# EAGLE board dualHbridge-v2 (EAGLE 8.7.1)
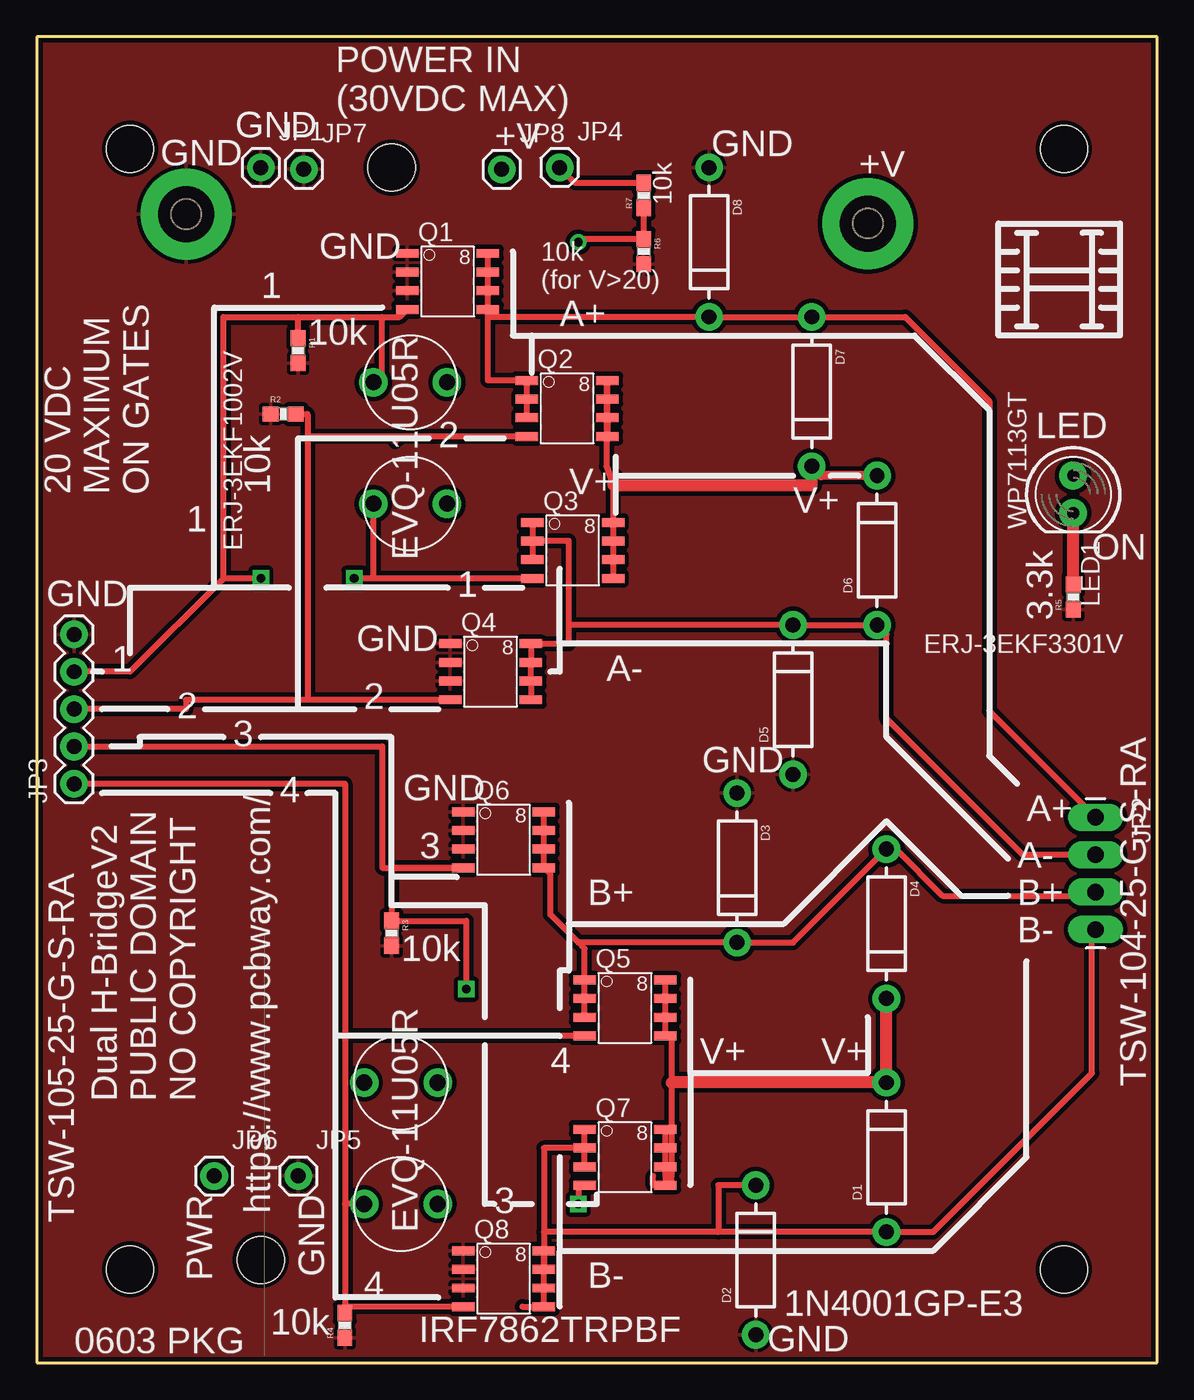
[diagram p0: board, top side]
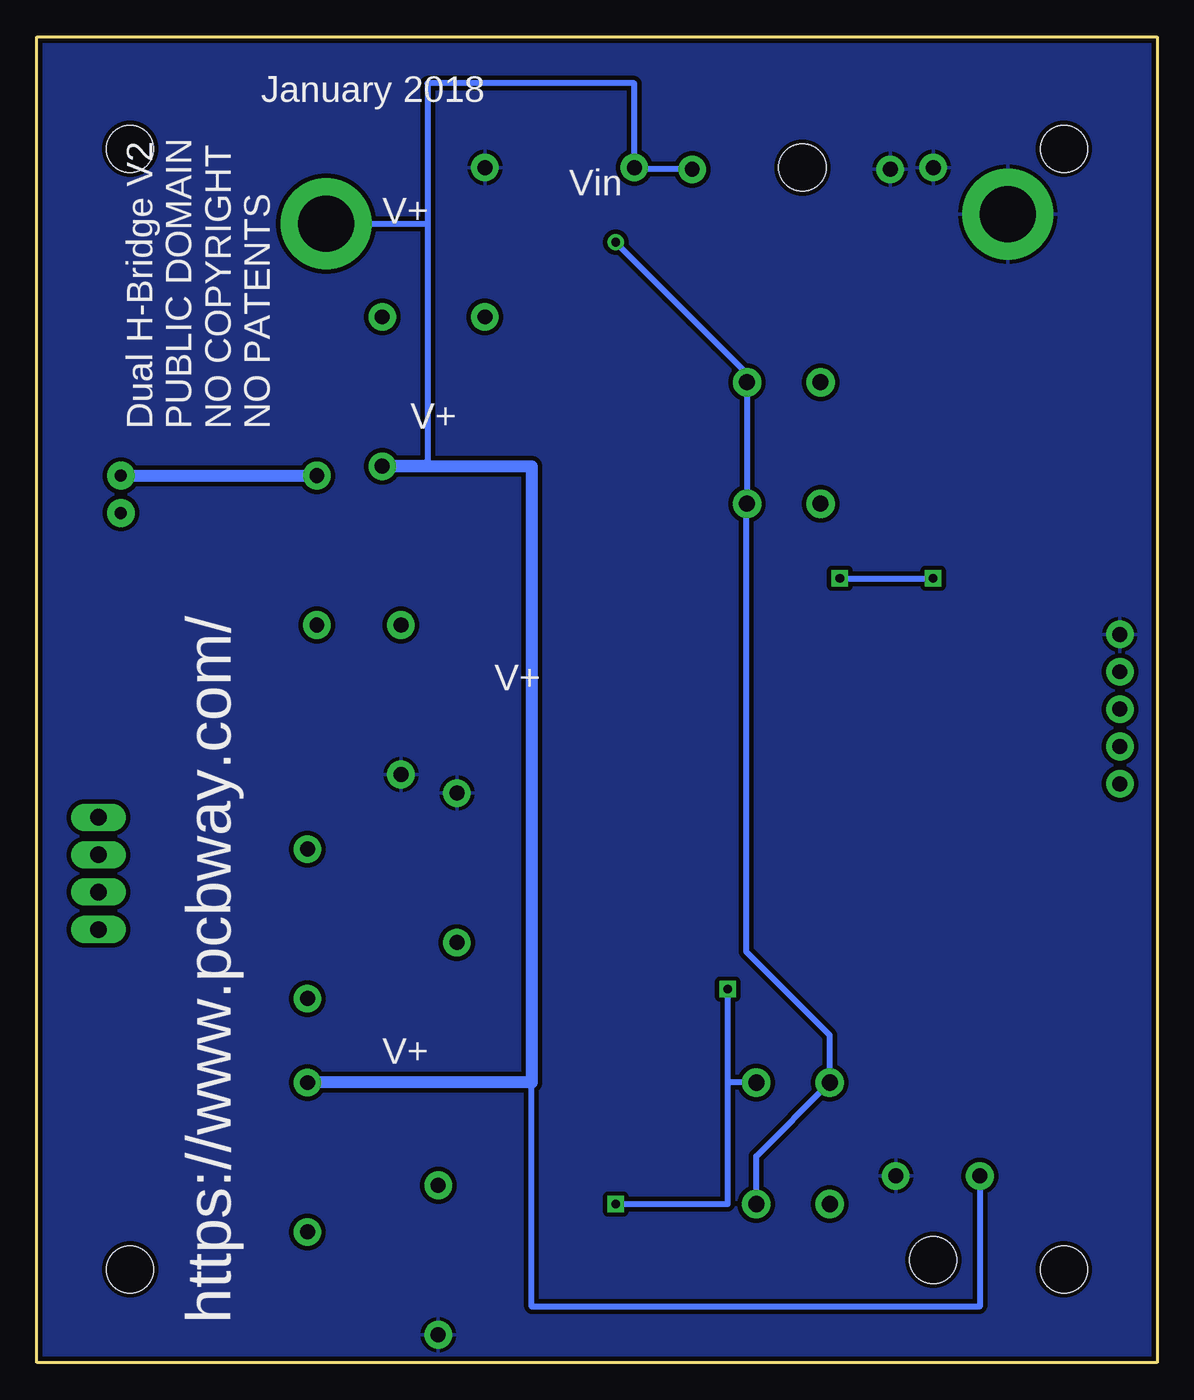
[diagram p1: board, bottom side, seen from below]

Size 76.2 x 90.17 mm. Coordinates in mm from the lower left corner, seen from the top.
Outline: 0,90.17 0,0 76.2,0 76.2,90.17 0,90.17
Copper layers (1*16): Top 0.035mm / dielectric 1.5mm / Bottom 0.035mm
Design rules "SparkFun": minimum track width 8mil, minimum drill 20mil, track to track 8mil, track to pad 8mil, pad to pad 8mil, via to via 8mil, smd to smd 8mil, copper to edge 10mil, drill to drill 8mil, minimum pad ring 12mil, minimum via ring 10mil, stop-mask expansion 4mil, vias tented up to drill 25mil, thermal gap 10mil
Net classes: 0 default: width 0.203 mm; 1 vcc: width 0.254 mm
Holes 3.2 mm at 6.35,82.55 69.85,82.55 6.35,6.35 69.85,6.35 24.13,81.28 15.24,6.99

## Footprints (pad centres in the part's own frame; a part is rotated, then mirrored left to right if it is on the bottom)
DIODE-1N4001-KIT = drill 1.016 pad 1.88: A -5.08,0; C 5.08,0
1X01 = drill 1.016 pad 1.88: 1 0,0
1X04_LONGPADS = drill 1.118 pad 1.88 long: 1 0,0; 2 2.54,0; 3 5.08,0; 4 7.62,0
1X05 = drill 1.016 pad 1.88: 1 0,0; 2 2.54,0; 3 5.08,0; 4 7.62,0; 5 10.16,0
SMTSO-256-ET = drill 3.81 pad 6.198: P$1 0,0
LED5MM = drill 0.813 pad 1.88: A -1.27,0; K 1.27,0
SO-8 = smd 1.524 x 0.61: 1 -2.743,1.905; 2 -2.743,0.635; 3 -2.743,-0.635; 4 -2.743,-1.905; 5 2.743,-1.905; 6 2.743,-0.635; 7 2.743,0.635; 8 2.743,1.905
0603-RES = smd 1.1 x 1: 1 -0.85,0; 2 0.85,0
BUTTON = drill 1.1 pad 1.93: P$1 -2.499,0; P$2 2.499,0

## Placement (x,y rotation side)
D1  [DIODE-1N4001-KIT]  57.78,13.97 90 top
D2  [DIODE-1N4001-KIT]  48.9,6.99 90 top
D3  [DIODE-1N4001-KIT]  47.62,33.66 270 top
D4  [DIODE-1N4001-KIT]  57.78,29.84 270 top
D5  [DIODE-1N4001-KIT]  51.44,45.09 90 top
D6  [DIODE-1N4001-KIT]  57.15,55.24 90 top
D7  [DIODE-1N4001-KIT]  52.7,66.04 270 top
D8  [DIODE-1N4001-KIT]  45.72,76.2 270 top
JP1  M01PTH  [1X01]  15.24,81.28 0 top
JP2  [1X04_LONGPADS]  72.01,37.08 270 top
JP3  [1X05]  2.54,39.37 90 top
JP4  M01PTH  [1X01]  35.56,81.28 0 top
JP5  M01PTH  [1X01]  17.78,12.7 0 top
JP6  M01PTH  [1X01]  12.06,12.7 0 top
JP7  M01PTH  [1X01]  18.16,81.15 0 top
JP8  M01PTH  [1X01]  31.62,81.15 0 top
JP9  M01-SMTSO-256-ET  [SMTSO-256-ET]  10.16,78.11 0 top
JP10  M01-SMTSO-256-ET  [SMTSO-256-ET]  56.52,77.47 0 top
LED1  [LED5MM]  70.48,59.05 270 top
Q1  FDS5680  [SO-8]  27.94,73.53 0 top
Q2  FDS5680  [SO-8]  36.07,64.9 0 top
Q3  FDS5680  [SO-8]  36.45,55.24 0 top
Q4  FDS5680  [SO-8]  30.86,46.99 0 top
Q5  FDS5680  [SO-8]  40.01,24.13 0 top
Q6  FDS5680  [SO-8]  31.75,35.56 0 top
Q7  FDS5680  [SO-8]  40.01,13.97 0 top
Q8  FDS5680  [SO-8]  31.75,5.71 0 top
R1  10k  [0603-RES]  17.78,68.83 270 top
R2  10k  [0603-RES]  16.76,64.52 0 top
R3  10k  [0603-RES]  24.13,29.21 270 top
R4  10k  [0603-RES]  20.95,2.54 90 top
R5  3.3k  [0603-RES]  70.48,52.07 90 top
R6  10k  [0603-RES]  41.27,75.56 270 top
R7  10k  [0603-RES]  41.27,79.38 90 top
U$1  BUTTON  [BUTTON]  24.77,10.79 0 top
U$2  BUTTON  [BUTTON]  24.77,19.05 180 top
U$3  BUTTON  [BUTTON]  25.4,66.67 0 top
U$4  BUTTON  [BUTTON]  25.4,58.42 0 top

## Library data of the parts
D1-D8 = SparkFun-DiscreteSemi
JP1-JP10 = SparkFun-Connectors
LED1 = SparkFun-LED
Q1-Q8 = transistor-fet
R1-R7 = SparkFun-Passives
U$1-U$4 = spietz-library

## Nets
12V: D1.C D4.C D6.C D7.C JP4.1 JP6.1 JP8.1 JP10.P$1 LED1.A Q2.5 Q2.6 Q2.7 Q2.8 Q3.5 Q3.6 Q3.7 Q3.8 Q5.5 Q5.6 Q5.7 Q5.8 Q7.5 Q7.6 Q7.7 Q7.8 R7.2
A+: D7.A D8.C JP2.1 Q1.5 Q1.6 Q1.7 Q1.8 Q2.1 Q2.2 Q2.3
A-: D5.C D6.A JP2.2 Q3.1 Q3.2 Q3.3 Q4.5 Q4.6 Q4.7 Q4.8
B+: D3.C D4.A JP2.3 Q5.1 Q5.2 Q5.3 Q6.5 Q6.6 Q6.7 Q6.8
B-: D1.A D2.C JP2.4 Q7.1 Q7.2 Q7.3 Q8.5 Q8.6 Q8.7 Q8.8
GND: D2.A D3.A D5.A D8.A JP1.1 JP3.5 JP5.1 JP7.1 JP9.P$1 Q1.1 Q1.2 Q1.3 Q4.1 Q4.2 Q4.3 Q6.1 Q6.2 Q6.3 Q8.1 Q8.2 Q8.3 R1.2 R2.1 R3.2 R4.1 R5.1 R6.2
N$4: LED1.K R5.2
N$6: JP3.4 Q1.4 Q3.4 R1.1 U$3.P$1 U$4.P$1
N$7: JP3.3 Q2.4 Q4.4 R2.2
N$8: R6.1 R7.1 U$1.P$2 U$2.P$2 U$3.P$2 U$4.P$2
N$13: JP3.2 Q6.4 Q7.4 R3.1 U$2.P$1
N$14: JP3.1 Q5.4 Q8.4 R4.2 U$1.P$1

## Tracks (layer width: path | path; a pad name or v marks a point on that pad's centre or on a via)
12V
  Top 0.406: Q7.5 41.91,12.06 41.91,12.7 | 43.18,12.7 43.18,19.05 43.18,22.23 Q5.5 Q5.6 Q5.7 Q5.8 | 43.18,12.7 42.75,12.7 Q7.6 | Q7.6 Q7.7 Q7.8 | Q7.5 43.18,12.06 43.18,12.7 | Q7.6 Q7.5 | Q2.5 Q2.6 Q2.7 Q2.8 38.73,66.8 38.73,60.96 39.19,59.69 Q3.8 Q3.7 Q3.6 Q3.5 | 39.37,60.33 39.37,59.69 | R7.2 36.62,80.22 JP4.1
  Top 0.61: D6.C 53.34,60.33 D7.C
  Top 0.813: 43.18,19.05 D1.C D4.C | 39.19,59.69 39.37,59.69 52.7,59.69 D7.C
  Bottom 0.406: 49.63,77.47 49.63,87 35.56,87 JP4.1 35.43,81.15 JP8.1 | 49.63,77.47 49.63,61.06 | JP10.P$1 49.63,77.47 | JP6.1 12.06,3.81 42.55,3.81 42.55,19.05
  Bottom 0.813: 49.63,61.06 49.53,60.96 D7.C 42.55,60.96 42.55,19.05 D1.C | LED1.A D6.C
A+
  Top 0.406: Q1.8 Q1.7 Q1.6 Q1.5 30.68,71.12 | Q2.3 Q2.2 Q2.1 30.68,66.8 30.68,71.12 | JP2.1 64.77,44.32 64.77,65.41 59.05,71.12 D7.A D8.C 30.68,71.12
A-
  Top 0.406: Q4.5 Q4.6 Q4.7 Q4.8 36.2,48.9 36.2,50.16 | JP2.2 67.06,34.54 57.78,43.81 57.78,49.53 D6.A D5.C 36.2,50.16 | Q3.1 Q3.2 | Q3.2 Q3.3 | 36.2,50.16 36.2,55.88 Q3.2
B+
  Top 0.406: Q5.3 Q5.2 Q5.1 37.26,28.14 36.83,28.57 | 36.83,28.57 34.92,30.48 34.92,33.22 Q6.5 Q6.6 Q6.7 Q6.8 | 36.83,28.57 D3.C 51.44,28.57 D4.A 58.42,34.92 61.59,31.75 71.75,31.75 JP2.3
B-
  Top 0.406: 33.02,3.81 Q8.5 Q8.6 Q8.7 | Q8.7 Q8.8 | Q7.2 Q7.1 | Q7.2 34.49,14.61 34.49,8.89 | 34.49,8.89 Q8.7 | Q7.3 Q7.2 | 46.35,8.89 D1.A 60.96,8.89 71.75,19.68 71.75,29.21 JP2.4 | 46.35,8.89 34.49,8.89 | D2.C 46.35,12.06 46.35,8.89
GND
  pour Top (isolate 0.305): 0,91.44 76.2,91.44 76.2,0 0,0
  pour Bottom (isolate 0.305): 0,91.44 76.2,90.81 76.2,0 0,0
N$4
  Top 0.813: R5.2 LED1.K
N$6  (via drill 0.6)
  Top 0.406: 12.7,53.34 6.35,46.99 JP3.4 | 12.7,53.34 12.7,71.12 17.78,71.12 | 17.78,71.12 23.5,71.12 | 23.5,71.12 24.69,71.12 Q1.4 | R1.1 17.78,71.12 | Q3.4 22.86,53.34 | 22.86,53.34 v21.59,53.34 | v15.24,53.34 12.7,53.34 | U$4.P$1 22.86,57.15 22.86,53.34 | U$3.P$1 23.5,66.67 23.5,71.12
  Bottom 0.406: v21.59,53.34 v15.24,53.34
N$7
  Top 0.406: Q4.4 18.41,45.09 | 18.41,45.09 10.16,45.09 10.16,44.45 JP3.3 | Q2.4 24.77,62.99 | 24.77,62.99 18.41,62.99 | 18.41,62.99 18.41,45.09 | 24.38,62.61 24.77,62.99 | R2.2 18.41,64.52 18.41,62.99
N$8  (via drill 0.6)
  Top 0.406: R7.1 R6.1 37.05,76.42 v36.83,76.2
  Bottom 0.406: U$1.P$2 27.26,14.05 U$2.P$2 22.27,22.27 27.94,27.94 27.94,58.38 U$4.P$2 U$3.P$2 27.9,67.27 v36.83,76.2
N$13  (via drill 0.6)
  Top 0.406: Q7.4 36.83,12.06 v36.83,10.79 | v29.21,25.4 29.21,30.06 R3.1 24.13,33.66 Q6.4 23.5,33.66 23.5,41.91 JP3.2
  Bottom 0.406: v36.83,10.79 29.21,10.79 29.21,19.05 | 29.21,19.05 v29.21,25.4 | U$2.P$1 29.21,19.05
N$14
  Top 0.406: Q8.4 20.95,3.81 R4.2 20.95,10.79 | Q5.4 20.95,22.23 | 20.95,22.23 20.95,10.79 | 20.95,22.23 20.95,39.37 JP3.1 | U$1.P$1 20.95,10.79

## Text on the board
tPlace: GND | POWER IN / (30VDC MAX) | GND | GND | V+ | V+ | 10k | GND | 10k / (for V>20) | 1 | EVQ-11U05R | A+ | 10k | WP7113GT | LED | 2 | 20 VDC / MAXIMUM / ON GATES | 10k | V+ | V+ | 1 | ERJ-3EKF1002V | 3.3k | ON | 1 | GND | GND | ERJ-3EKF3301V | 1 | A- | 2 | 2 | TSW-104-25-G-S-RA | 3 | GND | GND | 4 | A+ | 3 | A- | B+ | B+ | B- | 10k | EVQ-11U05R | 4 | V+ | V+ | Dual H-BridgeV2 / PUBLIC DOMAIN / NO COPYRIGHT | PWR | GND | TSW-105-25-G-S-RA | https://www.pcbway.com/ | 3 | B- | 4 | IRF7862TRPBF | 1N4001GP-E3 | GND | 10k | 0603 PKG
bPlace: January 2018 | Vin | V+ | V+ | Dual H-Bridge V2 / PUBLIC DOMAIN / NO COPYRIGHT / NO PATENTS | https://www.pcbway.com/ | V+ | V+
tValues: Tent Vias! | Arduino Wee v1.3